# EAGLE board proto (EAGLE 6.6.0), part 1 of 3
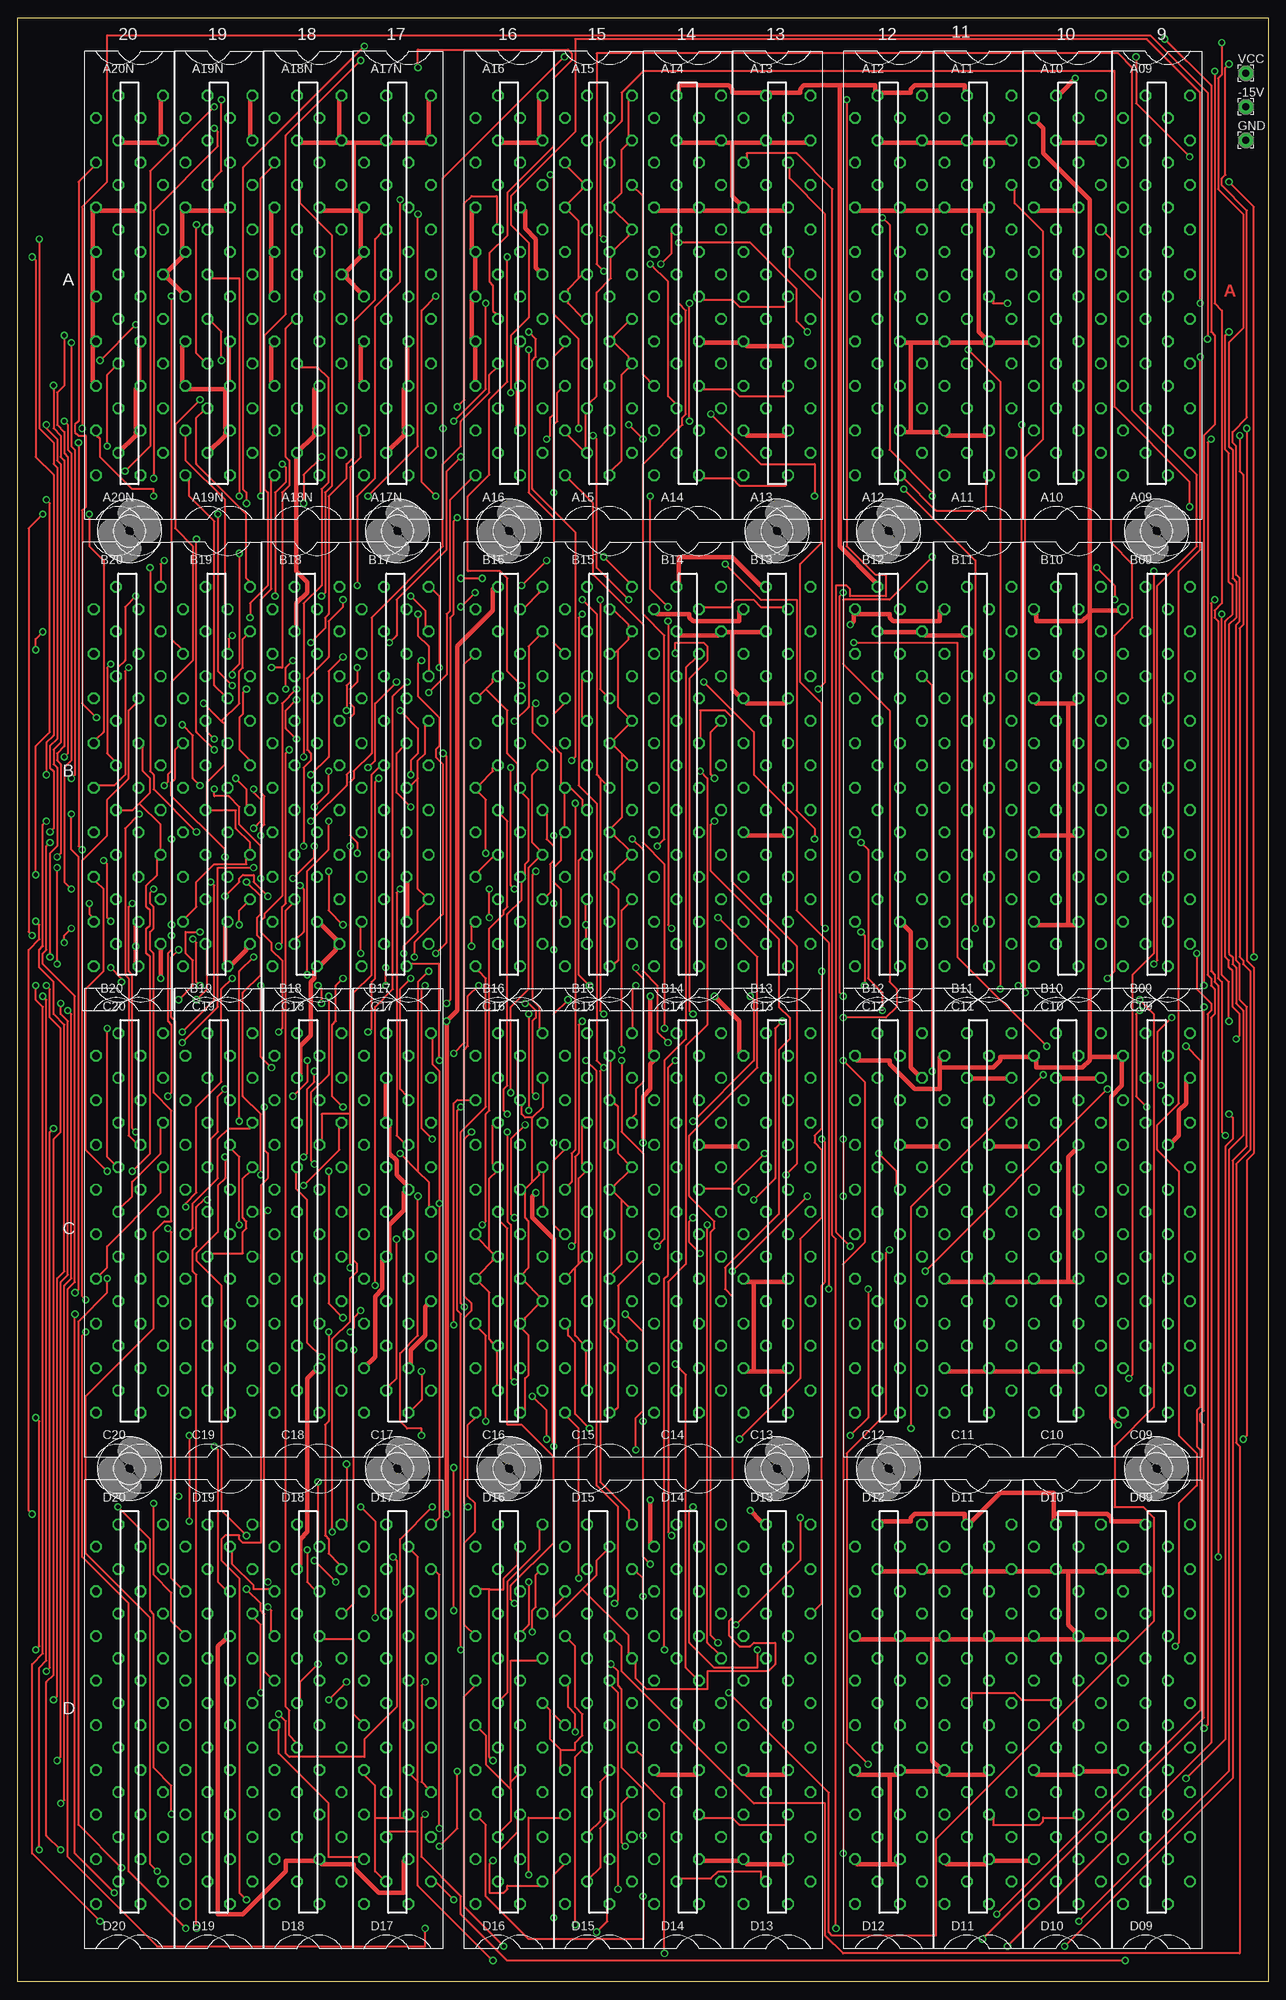
[diagram p0: board, top side]
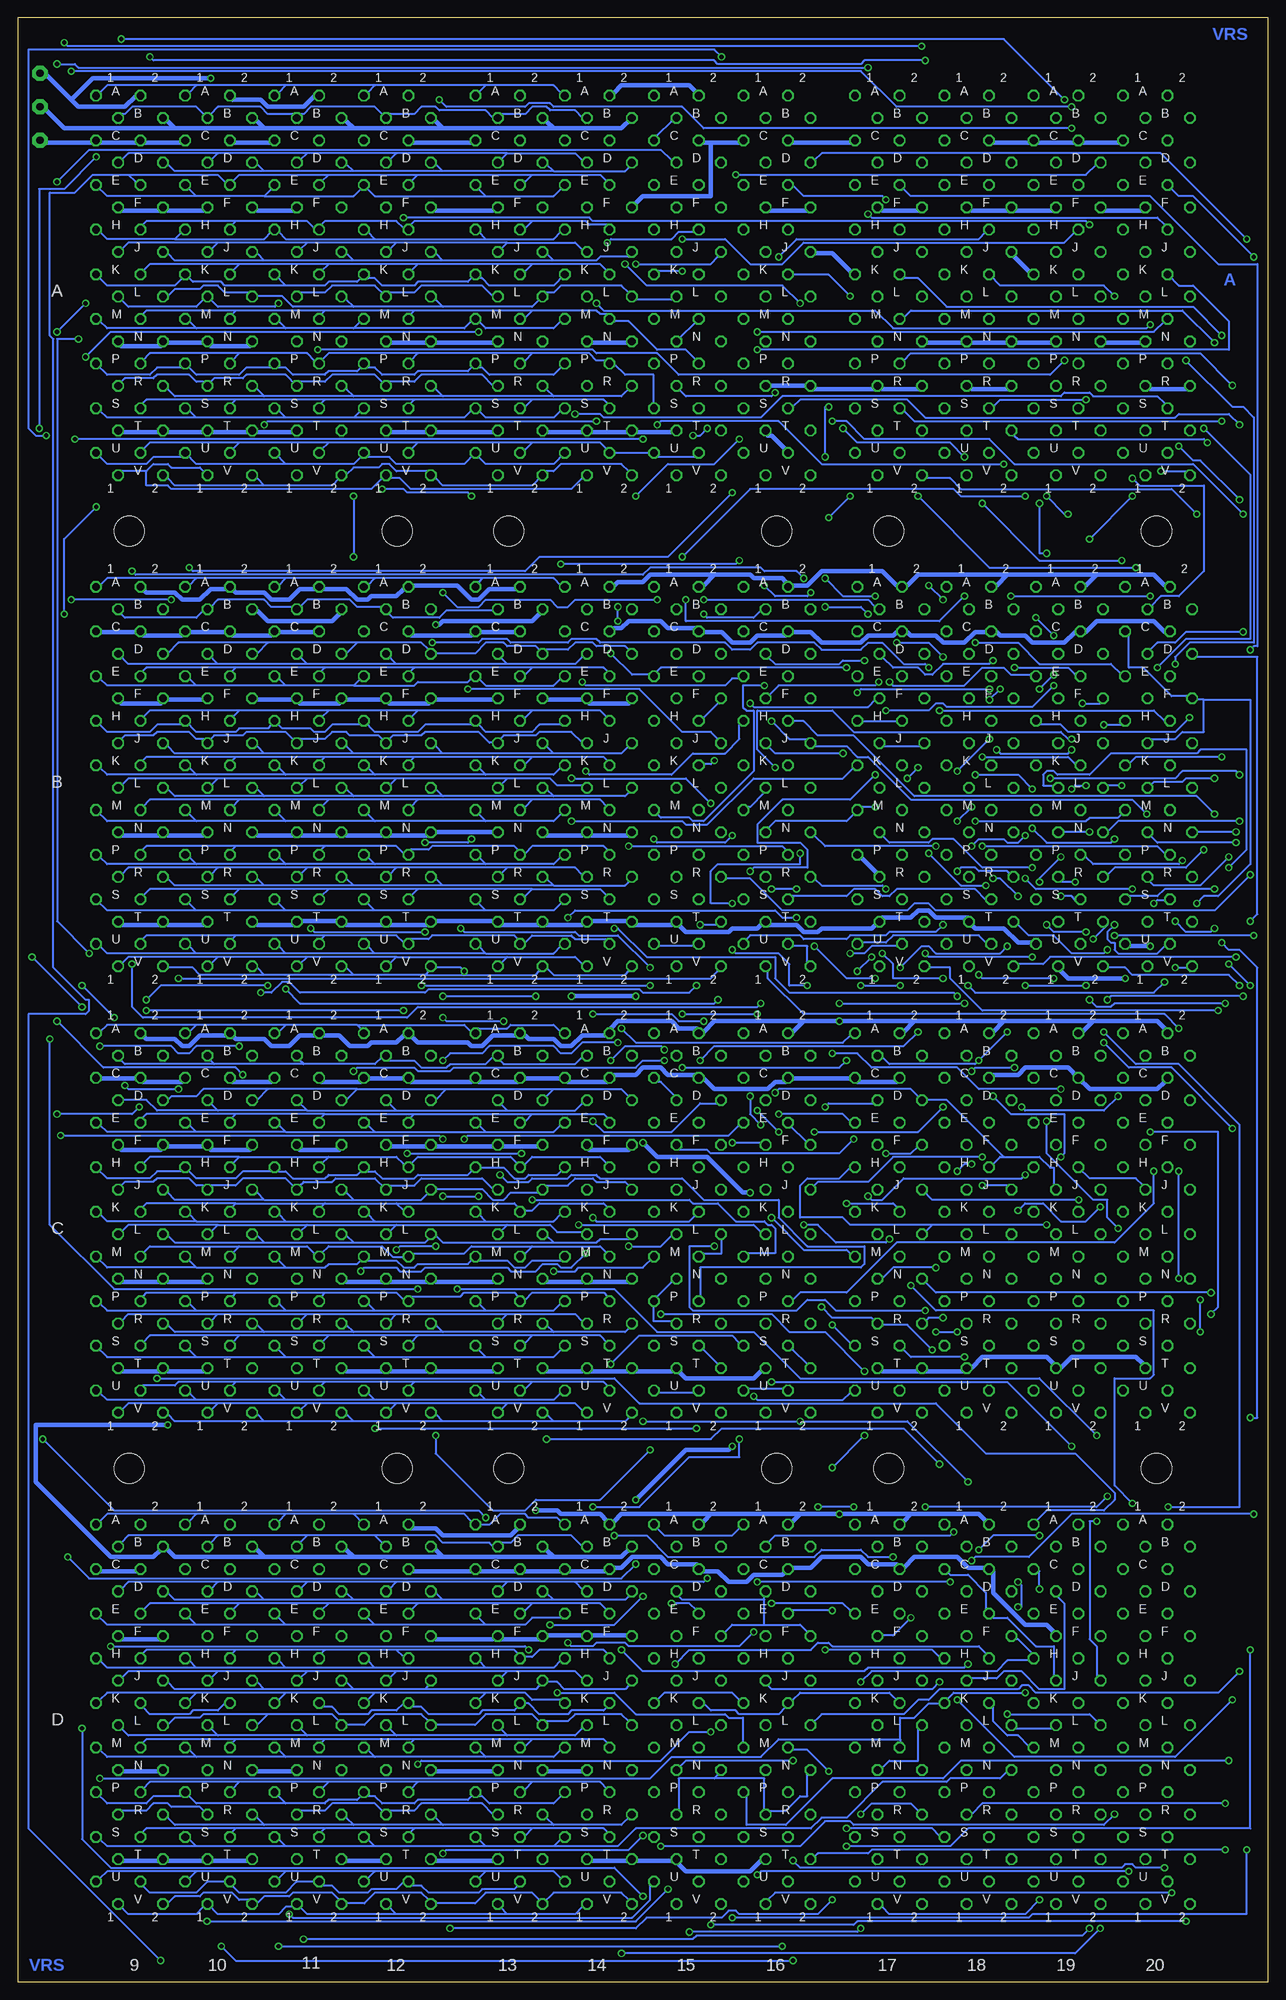
[diagram p1: board, bottom side, seen from below]

Size 177.86 x 279.39 mm. Coordinates in mm from the lower left corner, seen from the top.
Outline: 177.83,0 0,0 0.03,279.37 177.86,279.39 177.83,0
Copper layers (1*2*15*16): Top 0.035mm / dielectric 1.5mm / Route2 0.035mm / dielectric 0.15mm / Route15 0.035mm / dielectric 0.2mm / Bottom 0.035mm
Design rules "10mils": minimum track width 10mil, minimum drill 24mil, track to track 5mil, track to pad 10mil, pad to pad 10mil, via to via 5mil, smd to smd 10mil, copper to edge 40mil, drill to drill 10mil, minimum pad ring 10mil, minimum via ring 8mil, stop-mask expansion 0mil, vias tented up to drill 0mil, thermal gap 10mil
Net classes: 1 Power: width 0.635 mm

## Footprints (pad centres in the part's own frame; a part is rotated, then mirrored left to right if it is on the bottom)
2,15/1,0 = drill 1.016 pad 2.159 octagon: 1 0,0
H807 = drill 1.092 octagon: A1 4.763,28.575; A2 -1.587,28.575; B1 1.587,25.4; B2 -4.763,25.4; C1 4.763,22.225; C2 -1.587,22.225; D1 1.587,19.05; D2 -4.763,19.05; E1 4.763,15.875; E2 -1.587,15.875; F1 1.587,12.7; F2 -4.763,12.7; H1 4.763,9.525; H2 -1.587,9.525; J1 1.587,6.35; J2 -4.763,6.35; K1 4.763,3.175; K2 -1.587,3.175; L1 1.587,0; L2 -4.763,0; M1 4.763,-3.175; M2 -1.587,-3.175; N1 1.587,-6.35; N2 -4.763,-6.35; P1 4.763,-9.525; P2 -1.587,-9.525; R1 1.587,-12.7; R2 -4.763,-12.7; S1 4.763,-15.875; S2 -1.587,-15.875; T1 1.587,-19.05; T2 -4.763,-19.05; U1 4.763,-22.225; U2 -1.587,-22.225; V1 1.587,-25.4; V2 -4.763,-25.4
4,3 = hole 4.3: 0,0

## Placement (x,y rotation side)
-15V  [2,15/1,0]  174.66,266.69 0 top
A09  [H807]  161.96,239.7 0 top
A10  [H807]  149.26,239.7 0 top
A11  [H807]  136.56,239.7 0 top
A12  [H807]  123.86,239.7 0 top
A13  [H807]  107.99,239.7 0 top
A14  [H807]  95.29,239.7 0 top
A15  [H807]  82.59,239.7 0 top
A16  M903  [H807]  69.89,239.7 0 top
A17N  M903  [H807]  54.01,239.7 0 top
A18N  M903  [H807]  41.31,239.7 0 top
A19N  M903  [H807]  28.61,239.7 0 top
A20N  M903  [H807]  15.91,239.7 0 top
B09  [H807]  161.96,169.85 0 top
B10  [H807]  149.26,169.85 0 top
B11  [H807]  136.56,169.85 0 top
B12  [H807]  123.86,169.85 0 top
B13  [H807]  107.99,169.85 0 top
B14  [H807]  95.29,169.85 0 top
B15  [H807]  82.59,169.85 0 top
B16  [H807]  69.89,169.85 0 top
B17  [H807]  53.69,169.85 0 top
B18  [H807]  40.99,169.85 0 top
B19  [H807]  28.29,169.85 0 top
B20  [H807]  15.59,169.85 0 top
C09  [H807]  161.96,106.35 0 top
C10  [H807]  149.26,106.35 0 top
C11  [H807]  136.56,106.35 0 top
C12  [H807]  123.86,106.35 0 top
C13  [H807]  107.99,106.35 0 top
C14  [H807]  95.29,106.35 0 top
C15  [H807]  82.59,106.35 0 top
C16  [H807]  69.89,106.35 0 top
C17  M206X  [H807]  54.01,106.35 0 top
C18  M310  [H807]  41.31,106.35 0 top
C19  M310  [H807]  28.61,106.35 0 top
C20  M310  [H807]  15.91,106.35 0 top
D09  [H807]  161.96,36.5 0 top
D10  [H807]  149.26,36.5 0 top
D11  [H807]  136.56,36.5 0 top
D12  [H807]  123.86,36.5 0 top
D13  [H807]  107.99,36.5 0 top
D14  [H807]  95.29,36.5 0 top
D15  M206X  [H807]  82.59,36.5 0 top
D16  M206X  [H807]  69.89,36.5 0 top
D17  M206X  [H807]  54.01,36.5 0 top
D18  [H807]  41.31,36.5 0 top
D19  M921  [H807]  28.61,36.5 0 top
D20  H807  [H807]  15.91,36.5 0 top
GND  [2,15/1,0]  174.66,261.92 0 top
U$20  [4,3]  15.91,206.36 0 top
U$66  [4,3]  54.01,206.36 0 top
U$67  [4,3]  69.89,206.36 0 top
U$68  [4,3]  107.99,206.36 0 top
U$69  [4,3]  123.86,206.36 0 top
U$70  [4,3]  161.96,206.36 0 top
U$79  [4,3]  161.96,73.01 0 top
U$80  [4,3]  123.86,73.01 0 top
U$81  [4,3]  107.99,73.01 0 top
U$82  [4,3]  69.89,73.01 0 top
U$83  [4,3]  54.01,73.01 0 top
U$86  [4,3]  15.91,73.01 0 top
VCC  [2,15/1,0]  174.66,271.45 0 top

## Library data of the parts
-15V GND VCC = wirepad
A09 A10-A16 A17N A18N A19N A20N B09 B10-B20 C09 C10-C20 D09 D10-D20 = dec-m
U$20 U$66-U$70 U$79-U$83 U$86 = holes

## Nets
-15V [Power]: -15V.1 A09.B2 A10.B2 A11.B2 A12.B2 A13.B2 A14.B2 B09.B2 B10.B2 B11.B2 B12.B2 B13.B2 B14.B2 C09.B2 C10.B2 C11.B2 C12.B2 C13.B2 C14.B2 D09.B2 D10.B2 D11.B2 D12.B2 D13.B2 D14.B2
A15U1: A09.U2 A10.U2 A11.U2 A12.U2 A13.U2 A14.U2 A15.A1 A15.B1 A15.C1 A15.F1 A15.H1 A15.J1 A15.S2 A15.T2 A15.U1 A15.U2
A15V1: A15.D2 A15.E2 A15.F2 A15.K2 A15.L2 A15.M1 A15.M2 A15.N1 A15.P1 A15.V1
B17S1: B17.H1 B17.H2 B17.L1 B17.S1 D17.D1 D17.N2 D17.R1 D17.U2
B17V1: B16.A1 B16.B1 B17.V1 D15.A1 D15.K2 D16.A1 D16.K2 D17.K2
C16U1: C16.E2 C16.F2 C16.H2 C16.L2 C16.M2 C16.N2 C16.S2 C16.T2 C16.U1 C16.U2
D01BINIT: A15.R2 C16.R2 D18.B1
D01BTP2L: B16.U2 B16.V2 C17.R1 D18.E1
D01DEL1H: B16.C1 B16.J2 C20.F1
D01DEL1L: B16.D1 C17.F2 C17.K1
D01DEL2: B16.D2 C19.H2 C20.J1
D01DEL3: C17.H1 C17.L2 C19.F1
D01DEL4: B16.K1 B16.P1 C17.D2 C17.S2 C18.H2 C19.J1
D01DEL5: B16.N2 C17.N1 C18.F1
D01DONEH: D09.S1 D10.S1 D11.S1 D12.S1 D13.S1 D14.S1 D18.N2
D01DONEL: B16.S2 B18.S2 D18.M2
D01INHIBIT: A09.P2 A10.P2 A11.P2 A12.P2 A13.P2 A14.P2 A15.S1
D01INITL: A15.V2 C17.A1 C17.K2 D17.A1
D01LOADMDL: B16.N1 B17.J1 B17.J2 B17.M1
D01MEMDONEL: A16.S2 B18.V2
D01MEMSTARTL: B16.T2 C17.D1 D18.H1
D01POWEROK: B09.V2 B10.V2 B11.V2 B12.V2 B13.V2 B14.V2 D18.A1
D01READH: B16.E2 B16.F2 B16.L1 B16.M1 B16.R1 B16.S1 C17.E1
D01READL: A09.K2 A10.K2 A11.K2 A12.K2 A13.K2 A14.K2 B16.P2 B16.R2 C17.F1
D01RETURN: A09.R2 A10.R2 A11.R2 A12.R2 A13.R2 A14.R2 A15.E1
D01SELECTH: C16.K2 D17.E1
D01SELECTL: B18.T2 D17.F1
D01SELH: D17.C1 D18.S1
D01SELL: B17.V2 D18.R1
D01SOURCE: A09.L2 A10.L2 A11.L2 A12.L2 A13.L2 A14.L2 A15.L1
D01STROBE: A09.M2 A10.M2 A11.M2 A12.M2 A13.M2 A14.M2 A15.P2
D01STROBEL: A16.P2 B17.U1 B18.U2
D01WRITE: A09.S2 A10.S2 A11.S2 A12.S2 A13.S2 A14.S2 A15.J2
D01WRITEH: B16.K2 B16.L2 C16.D2 C17.S1
D02MEM0: A17N.E2 B20.D1
D02MEM1: A17N.H2 B20.E1
D02MEM2: A17N.K2 B20.K1
D02MEM3: A17N.M2 B20.L1
D02MEM4: A17N.P2 B20.R1
D02MEM5: A17N.S2 B20.S1
D02MEM6: A17N.T2 B20.H2
D02MEM7: A17N.V2 B20.J2
D02MEM8: A16.D2 B20.N2
D02MEM9: A16.E2 B20.P2
D02MEM10: A16.H2 B20.U2
D02MEM11: A16.K2 B20.V2
D03BEMA0L: A09.D2 A10.D2 A11.D2 A12.D2 A13.D2 A14.D2 D17.U1
D03BEMA1L: A09.E2 A10.E2 A11.E2 A12.E2 A13.E2 A14.E2 D17.R2
D03BEMA2L: A09.H2 A10.H2 A11.H2 A12.H2 A13.H2 A14.H2 D17.V1
D03BMA0: A20N.K2 B15.D2
D03BMA1: A20N.M2 B15.K2
D03BMA2: A20N.P2 B15.R2
D03BMA3: A20N.S2 C15.A1
D03BMA4: A20N.T2 C15.F1
D03BMA5: A20N.V2 C15.M1
D03BMA6: A19N.D2 C15.D2
D03BMA7: A19N.E2 C15.K2
D03BMA8: A19N.H2 C15.R2
D03BMA9: A19N.K2 C16.A1
D03BMA10: A19N.M2 C16.F1
D03BMA11: A19N.P2 C16.M1
D03BTP2: A16.V2 C17.B1 D18.D1
D03EA0: A18N.D2 B15.A1
D03EA1: A18N.E2 B15.F1
D03EA2: A18N.H2 B15.M1
D03EMA0H: B17.D1 D17.P1 D18.F2 D19.H1
D03EMA0L: B15.E1 B17.A1 D18.C1 D18.E2 D19.J1
D03EMA1H: B17.E1 D17.M2 D18.K1 D19.E1
D03EMA1L: B15.L1 B17.B1 D18.J1 D19.D1
D03EMA2H: D17.T2 D18.L2 D19.L1
D03EMA2L: B15.S1 D18.K2 D19.M1
D03MA0L: A09.D1 A10.D1 A11.D1 A12.D1 A13.D1 A14.D1 B15.J2
D03MA1L: A09.E1 A10.E1 A11.E1 A12.E1 A13.E1 A14.E1 B15.P2
D03MA2L: A09.H1 A10.H1 A11.H1 A12.H1 A13.H1 A14.H1 B15.V2
D03MA3L: A09.J1 A10.J1 A11.J1 A12.J1 A13.J1 A14.J1 C15.E1
D03MA4L: B09.D1 B10.D1 B11.D1 B12.D1 B13.D1 B14.D1 C15.L1
D03MA5L: B09.E1 B10.E1 B11.E1 B12.E1 B13.E1 B14.E1 C15.S1
D03MA6L: B09.H1 B10.H1 B11.H1 B12.H1 B13.H1 B14.H1 C15.J2
D03MA7L: B09.J1 B10.J1 B11.J1 B12.J1 B13.J1 B14.J1 C15.P2
D03MA8L: C15.V2 D09.D1 D10.D1 D11.D1 D12.D1 D13.D1 D14.D1
D03MA9L: C16.E1 D09.E1 D10.E1 D11.E1 D12.E1 D13.E1 D14.E1
D03MA10L: C16.L1 D09.H1 D10.H1 D11.H1 D12.H1 D13.H1 D14.H1
D03MA11L: C16.S1 D09.J1 D10.J1 D11.J1 D12.J1 D13.J1 D14.J1
D03MCBMB0L: A19N.S2 B19.A1
D03MCBMB1L: A19N.T2 B19.B1
D03MCBMB2L: A19N.V2 B19.F1
D03MCBMB3L: A20N.D2 B19.H1
D03MCBMB4L: A20N.E2 B19.M1
D03MCBMB5L: A20N.H2 B19.N1
D03MCBMB6L: A18N.K2 B19.D2
D03MCBMB7L: A18N.M2 B19.E2
D03MCBMB8L: A18N.P2 B19.K2
D03MCBMB9L: A18N.S2 B19.L2
D03MCBMB10L: A18N.T2 B19.R2
D03MCBMB11L: A18N.V2 B19.S2
D03MD4L: B09.K1 B10.K1 B11.K1 B12.K1 B13.K1 B14.K1
D03MD5L: B09.L1 B10.L1 B11.L1 B12.L1 B13.L1 B14.L1
D03MD6L: B09.M1 B10.M1 B11.M1 B12.M1 B13.M1 B14.M1
D03MD7L: B09.P1 B10.P1 B11.P1 B12.P1 B13.P1 B14.P1
D03MD8L: D09.K1 D10.K1 D11.K1 D12.K1 D13.K1 D14.K1
D03MD9L: D09.L1 D10.L1 D11.L1 D12.L1 D13.L1 D14.L1
D03MD10L: D09.M1 D10.M1 D11.M1 D12.M1 D13.M1 D14.M1
D03MD11L: D09.P1 D10.P1 D11.P1 D12.P1 D13.P1 D14.P1
D03MEMSTART: A16.M2 D17.B1 D17.L2 D17.N1 D17.S2 D18.F1
D04MD0L: A09.K1 A10.K1 A11.K1 A12.K1 A13.K1 A14.K1
D04MD1L: A09.L1 A10.L1 A11.L1 A12.L1 A13.L1 A14.L1
D04MD2L: A09.M1 A10.M1 A11.M1 A12.M1 A13.M1 A14.M1
D04MD3L: A09.P1 A10.P1 A11.P1 A12.P1 A13.P1 A14.P1
GND [Power]: A09.C1 A09.C2 A09.F1 A09.F2 A09.N1 A09.N2 A09.T1 A09.T2 A10.C1 A10.C2 A10.F1 A10.F2 A10.N1 A10.N2 A10.T1 A10.T2 A11.C1 A11.C2 A11.F1 A11.F2 A11.N1 A11.N2 A11.T1 A11.T2 A12.C1 A12.C2 A12.F1 A12.F2 A12.N1 A12.N2 A12.T1 A12.T2 A13.C1 A13.C2 A13.F1 A13.F2 A13.N1 A13.N2 A13.T1 A13.T2 A14.C1 A14.C2 A14.F1 A14.F2 A14.N1 A14.N2 A14.T1 A14.T2 A15.C2 A15.T1 A16.A1 A16.C1 A16.C2 A16.F1 A16.F2 A16.J2 A16.K1 A16.L2 A16.N1 A16.N2 A16.R1 A16.R2 A16.T1 A16.U2 A17N.A1 A17N.C1 A17N.C2 A17N.F1 A17N.F2 A17N.J2 A17N.K1 A17N.L2 A17N.N1 A17N.N2 A17N.R1 A17N.R2 A17N.T1 A17N.U2 A18N.A1 A18N.C1 A18N.C2 A18N.F1 A18N.F2 A18N.J2 A18N.K1 A18N.L2 A18N.N1 A18N.N2 A18N.R1 A18N.R2 A18N.T1 A18N.U2 A19N.A1 A19N.C1 A19N.C2 A19N.F1 A19N.F2 A19N.J2 A19N.K1 A19N.L2 A19N.N1 A19N.N2 A19N.R1 A19N.R2 A19N.T1 A19N.U2 A20N.A1 A20N.C1 A20N.C2 A20N.F1 A20N.F2 A20N.J2 A20N.K1 A20N.L2 A20N.N1 A20N.N2 A20N.R1 A20N.R2 A20N.T1 A20N.U2 B09.C1 B09.C2 B09.F1 B09.F2 B09.N1 B09.N2 B09.T1 B09.T2 B10.C1 B10.C2 B10.F1 B10.F2 B10.N1 B10.N2 B10.T1 B10.T2 B11.C1 B11.C2 B11.F1 B11.F2 B11.N1 B11.N2 B11.T1 B11.T2 B12.C1 B12.C2 B12.F1 B12.F2 B12.N1 B12.N2 B12.T1 B12.T2 B13.C1 B13.C2 B13.F1 B13.F2 B13.N1 B13.N2 B13.T1 B13.T2 B14.C1 B14.C2 B14.F1 B14.F2 B14.N1 B14.N2 B14.T1 B14.T2 B15.C2 B15.T1 B16.C2 B16.T1 B17.C2 B17.P1 B17.R1 B17.T1 B18.C2 B18.T1 B18.U1 B18.V1 B19.C2 B19.T1 B19.U1 B19.V1 B20.C2 B20.T1 B20.U1 B20.V1 C09.C1 C09.C2 C09.F1 C09.F2 C09.N1 C09.N2 C09.T1 C09.T2 C10.C1 C10.C2 C10.F1 C10.F2 C10.N1 C10.N2 C10.T1 C10.T2 C11.C1 C11.C2 C11.F1 C11.F2 C11.N1 C11.N2 C11.T1 C11.T2 C12.C1 C12.C2 C12.F1 C12.F2 C12.N1 C12.N2 C12.T1 C12.T2 C13.C1 C13.C2 C13.F1 C13.F2 C13.N1 C13.N2 C13.T1 C13.T2 C14.C1 C14.C2 C14.F1 C14.F2 C14.N1 C14.N2 C14.T1 C14.T2 C15.C2 C15.T1 C16.C2 C16.T1 C17.C1 C17.C2 C17.E2 C17.J1 C17.M2 C17.P1 C17.T1 C17.T2 C18.C2 C18.T1 C19.C2 C19.T1 C20.C2 C20.T1 D09.C1 D09.C2 D09.F1 D09.F2 D09.N1 D09.N2 D09.T1 D09.T2 D10.C1 D10.C2 D10.F1 D10.F2 D10.N1 D10.N2 D10.T1 D10.T2 D11.C1 D11.C2 D11.F1 D11.F2 D11.N1 D11.N2 D11.T1 D11.T2 D12.C1 D12.C2 D12.F1 D12.F2 D12.N1 D12.N2 D12.T1 D12.T2 D13.C1 D13.C2 D13.F1 D13.F2 D13.N1 D13.N2 D13.T1 D13.T2 D14.C1 D14.C2 D14.F1 D14.F2 D14.N1 D14.N2 D14.T1 D14.T2 D15.C2 D15.T1 D16.C2 D16.T1 D17.C2 D17.T1 D18.C2 D18.T1 D19.F1 GND.1
N$1: B15.B1 B15.C1 B15.D1 B15.H1 B15.J1 B15.K1 B15.N1 B15.P1 B15.R1 B15.V1
N$2: B15.E2 B15.F2 B15.H2 B15.L2 B15.M2 B15.N2 B15.S2 B15.T2 B15.U1 B15.U2
N$3: B19.R1 D15.P1
N$4: C15.B1 C15.C1 C15.D1 C15.H1 C15.J1 C15.K1 C15.N1 C15.P1 C15.R1 C15.V1
N$5: B19.E1 D15.E2
N$6: C15.E2 C15.F2 C15.H2 C15.L2 C15.M2 C15.N2 C15.S2 C15.T2 C15.U1 C15.U2
N$7: B19.D1 D15.C1
N$8: B17.K1 D15.B1 D15.D2 D15.H1 D15.L2
N$9: B19.L1 D15.M2
N$10: A09.A1 A10.A1 A11.A1 A12.A1 A13.A1 A14.A1
N$12: B20.H1 D15.R2
N$13: B19.K1 D15.J1
N$14: B20.A1 D15.F1
N$15: B20.B1 D15.J2
N$16: B17.K2 D15.N1 D15.S2 D16.B1 D16.D2
N$17: B20.F1 D15.M1
N$18: B19.S1 D15.T2
N$19: B19.J2 D16.E2
N$20: B19.C1 B19.F2 B19.J1 B19.M2 B19.P1 B19.T2 C16.J2
N$21: C16.V2 D15.D1 D15.F2 D15.K1 D15.N2 D15.R1 D15.U2 D16.D1 D16.F2 D16.K1 D16.N2 D16.R1 D16.U2
N$22: B20.C1 B20.F2 B20.J1 B20.M2 B20.P1 B20.T2 C16.P2
N$23: B19.H2 D16.C1
N$24: B20.N1 D15.V1
N$25: B20.E2 D16.J2
N$26: B20.D2 D16.F1
N$27: B20.M1 D15.U1
N$28: A09.B1 A10.B1 A11.B1 A12.B1 A13.B1 A14.B1
N$29: B20.S2 D16.V1
N$30: B20.R2 D16.U1
N$34: C19.H1 C19.M2
N$35: B16.V1 C20.H2
N$37: B19.V2 D16.T2
N$40: B19.U2 D16.P1
N$41: B17.N1 D16.H1 D16.L2 D16.N1 D16.S2
N$46: B16.H2 C17.N2
N$49: A09.J2 A10.J2 A11.J2 A12.J2 A13.J2 A14.J2
N$50: B19.P2 D16.M2
N$53: B19.N2 D16.J1
N$62: A09.R1 A10.R1 A11.R1 A12.R1 A13.R1 A14.R1
N$64: A09.S1 A10.S1 A11.S1 A12.S1 A13.S1 A14.S1
N$67: B20.L2 D16.R2
N$68: B20.K2 D16.M1
N$70: A09.U1 A10.U1 A11.U1 A12.U1 A13.U1 A14.U1
N$72: A09.V1 A10.V1 A11.V1 A12.V1 A13.V1 A14.V1
N$73: B17.C1 D19.A1
N$74: A09.V2 A10.V2 A11.V2 A12.V2 A13.V2 A14.V2
N$75: B09.A1 B10.A1 B11.A1 B12.A1 B13.A1 B14.A1
N$77: B09.B1 B10.B1 B11.B1 B12.B1 B13.B1 B14.B1
N$82: B09.D2 B10.D2 B11.D2 B12.D2 B13.D2 B14.D2
N$85: B09.E2 B10.E2 B11.E2 B12.E2 B13.E2 B14.E2
N$89: B09.H2 B10.H2 B11.H2 B12.H2 B13.H2 B14.H2
N$91: C20.E1 C20.K2
N$92: B16.M2 C17.U2
N$93: C20.H1 C20.N2
N$94: B16.U1 B18.R2
N$96: A15.D1 C17.J2
N$97: C19.E1 C19.L2
N$98: B09.J2 B10.J2 B11.J2 B12.J2 B13.J2 B14.J2
N$99: C18.E1 C18.J2
N$100: A15.K1 C17.M1
N$101: A15.N2 C17.R2
N$103: D18.D2 D19.B1
N$104: A15.H2 C17.U1
N$105: B09.K2 B10.K2 B11.K2 B12.K2 B13.K2 B14.K2
N$107: B09.L2 B10.L2 B11.L2 B12.L2 B13.L2 B14.L2
N$108: B17.F1 D18.H2
N$109: A15.R1 C17.V1
N$111: D18.J2 D19.C1
N$112: B17.T2 D19.D2
N$113: B16.H1 D19.L2
N$115: B09.M2 B10.M2 B11.M2 B12.M2 B13.M2 B14.M2
N$121: B09.P2 B10.P2 B11.P2 B12.P2 B13.P2 B14.P2
N$122: C16.B1 C16.C1 C16.D1 C16.H1 C16.J1 C16.K1 C16.N1 C16.P1 C16.R1 C16.V1
N$123: B09.R1 B10.R1 B11.R1 B12.R1 B13.R1 B14.R1
N$126: B09.R2 B10.R2 B11.R2 B12.R2 B13.R2 B14.R2
N$127: B09.S1 B10.S1 B11.S1 B12.S1 B13.S1 B14.S1
N$128: B16.F1 D19.F2
N$129: B16.E1 D19.J2
N$130: B09.S2 B10.S2 B11.S2 B12.S2 B13.S2 B14.S2
N$132: B16.J1 B17.U2
N$134: B09.U1 B10.U1 B11.U1 B12.U1 B13.U1 B14.U1
N$135: B09.U2 B10.U2 B11.U2 B12.U2 B13.U2 B14.U2
N$136: B09.V1 B10.V1 B11.V1 B12.V1 B13.V1 B14.V1
N$141: C09.A1 C10.A1 C11.A1 C12.A1 C13.A1 C14.A1
N$144: C09.B1 C10.B1 C11.B1 C12.B1 C13.B1 C14.B1
N$154: C09.D1 C10.D1 C11.D1 C12.D1 C13.D1 C14.D1
N$156: C09.D2 C10.D2 C11.D2 C12.D2 C13.D2 C14.D2
N$157: C09.E1 C10.E1 C11.E1 C12.E1 C13.E1 C14.E1
N$158: C09.E2 C10.E2 C11.E2 C12.E2 C13.E2 C14.E2
N$163: C09.H1 C10.H1 C11.H1 C12.H1 C13.H1 C14.H1
N$164: C09.H2 C10.H2 C11.H2 C12.H2 C13.H2 C14.H2
N$165: C09.J1 C10.J1 C11.J1 C12.J1 C13.J1 C14.J1
N$166: C09.J2 C10.J2 C11.J2 C12.J2 C13.J2 C14.J2
N$167: C09.K1 C10.K1 C11.K1 C12.K1 C13.K1 C14.K1
N$168: C09.K2 C10.K2 C11.K2 C12.K2 C13.K2 C14.K2
N$169: C09.L1 C10.L1 C11.L1 C12.L1 C13.L1 C14.L1
N$170: C09.L2 C10.L2 C11.L2 C12.L2 C13.L2 C14.L2
N$171: C09.M1 C10.M1 C11.M1 C12.M1 C13.M1 C14.M1
N$172: C09.M2 C10.M2 C11.M2 C12.M2 C13.M2 C14.M2
N$175: C09.P1 C10.P1 C11.P1 C12.P1 C13.P1 C14.P1
N$176: C09.P2 C10.P2 C11.P2 C12.P2 C13.P2 C14.P2
N$177: C09.R1 C10.R1 C11.R1 C12.R1 C13.R1 C14.R1
N$178: C09.R2 C10.R2 C11.R2 C12.R2 C13.R2 C14.R2
N$179: C09.S1 C10.S1 C11.S1 C12.S1 C13.S1 C14.S1
N$180: C09.S2 C10.S2 C11.S2 C12.S2 C13.S2 C14.S2
N$183: C09.U1 C10.U1 C11.U1 C12.U1 C13.U1 C14.U1
N$184: C09.U2 C10.U2 C11.U2 C12.U2 C13.U2 C14.U2
N$186: C09.V1 C10.V1 C11.V1 C12.V1 C13.V1 C14.V1
N$187: C09.V2 C10.V2 C11.V2 C12.V2 C13.V2 C14.V2
N$188: D09.A1 D10.A1 D11.A1 D12.A1 D13.A1 D14.A1
N$190: D09.B1 D10.B1 D11.B1 D12.B1 D13.B1 D14.B1
N$196: D09.D2 D10.D2 D11.D2 D12.D2 D13.D2 D14.D2
N$198: D09.E2 D10.E2 D11.E2 D12.E2 D13.E2 D14.E2
N$202: D09.H2 D10.H2 D11.H2 D12.H2 D13.H2 D14.H2
N$204: D09.J2 D10.J2 D11.J2 D12.J2 D13.J2 D14.J2
N$206: D09.K2 D10.K2 D11.K2 D12.K2 D13.K2 D14.K2
N$208: D09.L2 D10.L2 D11.L2 D12.L2 D13.L2 D14.L2
N$210: D09.M2 D10.M2 D11.M2 D12.M2 D13.M2 D14.M2
N$214: D09.P2 D10.P2 D11.P2 D12.P2 D13.P2 D14.P2
N$215: D09.R1 D10.R1 D11.R1 D12.R1 D13.R1 D14.R1
N$216: D09.R2 D10.R2 D11.R2 D12.R2 D13.R2 D14.R2
N$218: D09.S2 D10.S2 D11.S2 D12.S2 D13.S2 D14.S2
N$221: D09.U1 D10.U1 D11.U1 D12.U1 D13.U1 D14.U1
N$222: D09.U2 D10.U2 D11.U2 D12.U2 D13.U2 D14.U2
N$223: D09.V1 D10.V1 D11.V1 D12.V1 D13.V1 D14.V1
N$224: D09.V2 D10.V2 D11.V2 D12.V2 D13.V2 D14.V2
VCC [Power]: A09.A2 A10.A2 A11.A2 A12.A2 A13.A2 A14.A2 A15.A2 B09.A2 B10.A2 B11.A2 B12.A2 B13.A2 B14.A2 B15.A2 B16.A2 B17.A2 B18.A2 B19.A2 B20.A2 C09.A2 C10.A2 C11.A2 C12.A2 C13.A2 C14.A2 C15.A2 C16.A2 C17.A2 C18.A2 C19.A2 C20.A2 D09.A2 D10.A2 D11.A2 D12.A2 D13.A2 D14.A2 D15.A2 D16.A2 D17.A2 D18.A2 VCC.1

## Tracks (layer width: path | path; a pad name or v marks a point on that pad's centre or on a via)
-15V  (via drill 0.61)
  Top 0.635: v89.95,140.2 89.95,132.07 C14.B2 90.46,131.05 89.95,130.54 89.95,126.99 88.94,125.97 v88.94,119.37 | v99.1,140.2 102.65,136.64 102.65,132.07 C13.B2 | v73.7,112.26 73.19,111.75 73.19,108.7 76.24,105.65 v76.24,76.19 | v89.95,68.57 89.95,62.47 D14.B2 | 131.1,130.04 131.1,131.56 C11.B2 | 131.1,130.04 131.1,126.99 127.54,126.99 123.99,130.54 123.99,131.05 119.42,131.05 C12.B2 | 131.1,130.04 138.72,130.04 139.74,131.05 139.74,131.56 143.8,131.56 C10.B2 144.82,131.05 144.82,130.04 151.42,130.04 152.44,131.05 152.44,131.56 | 152.44,131.56 156.5,131.56 C09.B2 157.01,131.05 157.01,127.5 155.48,125.97 155.48,80.25 v156.5,79.24 | B14.B2 90.97,194.55 95.54,194.55 95.54,194.04 96.05,193.54 102.65,193.54 102.65,195.06 B13.B2 | B11.B2 131.1,195.06 131.1,193.54 124.5,193.54 123.99,194.04 123.99,194.55 119.42,194.55 B12.B2 118.91,194.55 118.91,193.54 v118.4,193.03 | 152.44,195.06 156.5,195.06 B09.B2 | 152.44,194.55 152.44,195.06 | 152.44,194.55 151.42,193.54 144.82,193.54 144.82,194.55 B10.B2 | 152.44,131.56 152.44,194.55 | 152.44,195.06 152.44,253.48 145.83,260.08 145.83,263.64 144.82,264.66 A10.B2
  Bottom 0.635: v89.95,140.2 v99.1,140.2 | 101.64,60.44 91.98,60.44 D14.B2 | 101.64,60.44 102.65,61.46 D13.B2 | 117.38,60.44 118.4,61.46 D12.B2 | 117.38,60.44 101.64,60.44 | 130.08,60.44 131.1,61.46 D11.B2 | 130.08,60.44 117.38,60.44 | 142.78,60.44 143.8,61.46 D10.B2 | 142.78,60.44 130.08,60.44 | 142.78,60.44 155.48,60.44 156.5,61.46 D09.B2 157.52,61.46 158.53,60.44 164.63,60.44 175.3,71.11 175.3,79.24 v156.5,79.24 | v88.94,119.37 86.9,117.34 79.79,117.34 74.71,112.26 v73.7,112.26 | v76.24,76.19 76.74,75.68 82.84,75.68 v89.95,68.57 | 101.64,263.64 91.98,263.64 A14.B2 | 101.64,263.64 102.65,264.66 A13.B2 | 117.38,263.64 118.4,264.66 A12.B2 | 117.38,263.64 101.64,263.64 | 130.08,263.64 131.1,264.66 A11.B2 | 130.08,263.64 117.38,263.64 | 142.78,263.64 143.8,264.66 A10.B2 | 142.78,263.64 130.08,263.64 | 155.48,263.64 156.5,264.66 A09.B2 | 142.78,263.64 155.48,263.64 | 155.48,263.64 171.23,263.64 173.77,266.18 -15V.1 | B10.B2 143.8,195.06 142.28,193.54 133.13,193.54 132.12,194.55 B11.B2 | v118.4,193.03 117.89,193.03 117.38,193.54 104.68,193.54 103.67,194.55 B13.B2
A15U1
  Top 0.254: A15.A1 86.9,267.7 86.9,262.62 A15.C1 86.9,261.61 85.89,260.59 85.89,254.5 84.36,252.97 A15.F1 84.87,251.96 86.9,249.92 A15.H1 86.9,248.91 86.9,248.4 84.87,246.37 A15.J1 84.36,245.35 84.36,242.3 82.33,240.27 82.33,225.54 81.32,224.52 A15.S2 80.81,223.51 80.81,217.92 A15.U2 80.3,217.92 78.27,219.95 A15.T2
  Bottom 0.254: A15.B1 84.87,264.66 86.9,262.62 A15.C1 | 104.68,218.94 105.7,217.92 A13.U2 | 104.68,218.94 95.03,218.94 94.02,217.92 A14.U2 93,217.41 87.92,217.41 A15.U1 86.9,216.9 81.32,216.9 A15.U2 | 120.94,218.94 121.96,217.92 A12.U2 | 104.68,218.94 120.94,218.94 | 133.64,218.94 134.66,217.92 A11.U2 | 120.94,218.94 133.64,218.94 | 146.34,218.94 147.36,217.92 A10.U2 | 133.64,218.94 146.34,218.94 | 146.34,218.94 159.04,218.94 160.06,217.92 A09.U2
A15V1
  Top 0.254: A15.D2 78.27,258.05 80.3,256.02 A15.E2 80.3,255.51 80.3,255 78.27,252.97 A15.F2 79.79,250.43 79.79,242.3 | A15.M2 80.3,236.72 78.27,238.75 78.27,239.26 A15.L2 78.27,240.27 78.27,240.78 79.79,242.3 | 79.79,242.3 80.3,242.81 A15.K2 | A15.V1 84.36,214.87 85.89,216.4 85.89,228.59 86.9,229.6 A15.P1 86.9,230.62 86.9,231.13 84.87,233.16 A15.N1 84.87,233.67 84.87,234.18 86.9,236.21 A15.M1
  Bottom 0.254: A15.N1 A15.M2
B17S1  (via drill 0.61)
  Top 0.254: 56.93,171.18 55.92,170.17 B17.L1 | 56.93,171.18 56.93,173.72 57.95,174.74 57.95,178.8 B17.H1 | 56.93,171.18 56.93,155.44 57.95,154.42 B17.S1 57.95,153.4 56.93,152.39 56.93,149.34 54.9,147.31 v54.9,146.29 | 50.84,23.36 50.84,27.93 49.31,29.45 D17.N2 | 50.84,23.36 50.84,15.74 51.85,14.72 D17.U2 | 50.84,23.36 54.39,23.36 | 54.39,23.36 54.9,23.36 D17.R1 | 54.39,53.84 55.41,54.85 D17.D1 | 54.39,23.36 54.39,53.84 | v46.26,142.74 45.25,141.72 45.25,136.64 44.74,136.13 44.74,125.97 v46.26,124.45 | v64.55,120.89 63.54,119.88 63.54,97.52 64.55,96.51 64.55,95.49 63.54,94.48 63.54,68.06 v64.04,67.55 | v58.96,67.55 54.39,62.98 54.39,53.84
  Bottom 0.254: B17.H2 52.87,179.31 57.95,179.31 B17.H1 | v54.9,146.29 53.38,144.77 53.38,142.74 v46.26,142.74 | v46.26,124.45 49.82,120.89 v64.55,120.89 | v58.96,67.55 v64.04,67.55
B17V1  (via drill 0.61)
  Top 0.254: B16.B1 72.17,195.57 74.2,197.6 74.2,198.11 B16.A1 | v59.98,131.05 59.98,144.77 55.92,144.77 B17.V1 | D15.A1 86.9,65.52 86.9,67.04 82.84,71.11 82.84,129.53 v83.35,130.04 82.33,131.05 82.33,167.63 79.79,170.17 79.79,194.04 v80.3,194.55 | D16.K2 68.62,40.12 69.63,41.14 69.63,56.88 74.2,61.46 74.2,64.5 D16.A1
  Bottom 0.254: D17.K2 53.88,41.14 66.58,41.14 67.6,40.12 D16.K2 68.62,39.1 69.63,38.09 75.22,38.09 75.73,38.6 79.28,38.6 80.3,39.61 D15.K2 | v59.98,131.05 61,130.04 v83.35,130.04 | D16.A1 76.24,63.49 85.89,63.49 86.9,64.5 D15.A1 | v80.3,194.55 79.79,194.04 73.19,194.04 72.17,195.06 B16.B1
C16U1
  Top 0.254: C16.E2 67.6,121.91 67.6,116.32 C16.H2 68.11,115.3 67.09,114.29 67.09,104.13 | 67.09,104.13 67.6,103.62 C16.M2 67.6,103.11 67.6,102.6 65.57,100.57 C16.N2 67.09,98.03 67.09,91.43 67.6,90.92 C16.S2 68.11,89.9 68.11,84.82 C16.U2 | 67.09,104.13 65.57,105.65 C16.L2
  Bottom 0.254: C16.F2 65.57,119.37 68.11,121.91 C16.E2 | C16.T2 65.57,87.87 67.6,89.9 68.11,89.9 C16.S2 | C16.U1 74.2,84.32 68.62,84.32 C16.U2
D01BINIT  (via drill 0.61)
  Top 0.254: v42.71,71.11 42.71,62.47 D18.B1 | v66.58,79.74 66.58,91.94 65.57,92.95 C16.R2 | v76.24,211.82 76.24,221.48 76.74,221.98 76.74,226.05 77.25,226.56 A15.R2 | v153.45,201.16 155.99,198.62 v155.99,196.58 | v170.22,196.58 169.71,196.08 169.71,143.75 170.22,143.24 170.22,142.23 170.72,141.72 v170.72,60.44 | v89.95,59.42 88.94,60.44 v88.94,79.74
  Bottom 0.254: v42.71,71.11 51.34,79.74 v66.58,79.74 v88.94,79.74 | v76.24,211.82 85.38,202.68 103.67,202.68 105.7,200.65 152.94,200.65 v153.45,201.16 | v155.99,196.58 v170.22,196.58 | v170.72,60.44 167.68,57.39 91.98,57.39 v89.95,59.42
D01BTP2L  (via drill 0.61)
  Top 0.254: v47.79,89.9 47.79,53.84 46.77,52.82 D18.E1 | v63.54,96 63.03,96.51 63.03,120.89 66.58,124.45 66.58,142.74 65.57,143.75 B16.V2
  Bottom 0.254: B16.V2 65.57,144.77 65.57,147.31 67.6,147.31 B16.U2 | v47.79,89.9 51.34,93.46 54.9,93.46 C17.R1 56.42,94.48 62.01,94.48 v63.54,96
D01DEL1H  (via drill 0.61)
  Top 0.254: v17.31,166.1 15.28,164.07 15.28,143.24 15.78,142.74 15.78,120.38 16.8,119.37 C20.F1 | v70.65,179.31 72.68,181.34 72.68,189.98 74.2,191.5 B16.C1
  Bottom 0.254: v17.31,166.1 19.34,168.14 50.84,168.14 56.93,174.23 58.46,174.23 59.98,175.76 64.55,175.76 B16.J2 65.57,176.77 68.11,176.77 v70.65,179.31
D01DEL1L  (via drill 0.61)
  Top 0.254: 56.93,115.3 58.46,113.78 58.46,110.22 C17.K1 | 56.93,115.3 v54.39,117.84 | v57.44,187.95 56.93,187.44 56.93,182.87 59.98,179.82 59.98,175.76 59.47,175.25 59.47,174.23 60.49,173.22 60.49,151.88 56.42,147.82 v56.42,145.78 | v58.46,143.75 56.93,142.23 56.93,115.3
  Bottom 0.254: v54.39,117.84 50.84,117.84 49.82,118.86 C17.F2 | v57.44,187.95 60.49,187.95 61,187.44 70.14,187.44 71.16,188.46 B16.D1 | v56.42,145.78 v58.46,143.75
D01DEL2  (via drill 0.61)
  Top 0.254: v62.01,132.07 63.54,133.59 63.54,187.44 64.55,188.46 B16.D2 | v29.5,126.99 28.48,125.97 28.48,120.89 27.47,119.88 27.47,116.32 C19.H2
  Bottom 0.254: C20.J1 17.82,113.27 18.83,114.29 25.44,114.29 C19.H2 | v62.01,132.07 58.46,132.07 56.42,130.04 44.23,130.04 41.18,126.99 v29.5,126.99
D01DEL3  (via drill 0.61)
  Top 0.254: v31.53,107.68 31.53,117.34 30.52,118.35 C19.F1
  Bottom 0.254: v31.53,107.68 47.79,107.68 | 47.79,107.68 48.8,106.67 C17.L2 | 47.79,107.68 59.47,107.68 60.49,108.7 66.58,108.7 66.58,113.27 65.57,114.29 61,114.29 59.47,115.81 C17.H1
D01DEL4  (via drill 0.61)
  Top 0.254: B16.K1 74.2,172.71 73.19,171.69 73.19,162.04 74.2,161.02 B16.P1 74.2,160.01 72.68,158.48 72.68,141.21 70.14,138.67 v70.14,126.48 | v43.22,88.89 41.18,90.92 41.18,111.24 39.66,112.76 39.66,115.3 C18.H2
  Bottom 0.254: 37.63,117.34 38.14,117.34 39.15,116.32 C18.H2 | 37.63,117.34 32.55,117.34 31.02,115.81 30.52,115.81 30.52,113.27 C19.J1 | v43.22,88.89 50.84,88.89 C17.S2 | 37.63,117.34 45.76,125.46 48.8,125.46 C17.D2 50.84,126.99 69.63,126.99 v70.14,126.48
D01DEL5  (via drill 0.61)
  Top 0.254: v47.28,101.59 47.28,123.43 | 47.28,123.43 43.22,123.43 43.22,119.37 C18.F1 | 47.28,123.43 v47.28,161.53
  Bottom 0.254: v47.28,101.59 53.38,101.59 54.9,100.06 C17.N1 | v47.28,161.53 63.03,161.53 64.55,163.06 B16.N2
D01DONEH
  Bottom 0.254: 101.64,19.29 100.62,20.31 D14.S1 | 101.64,19.29 111.29,19.29 | 111.29,19.29 112.3,20.31 D13.S1 | 101.64,19.29 92.49,19.29 89.95,21.83 65.06,21.83 63.54,23.36 59.98,23.36 54.9,28.44 45.76,28.44 45.25,28.94 38.14,28.94 37.12,29.96 D18.N2 | 127.04,19.29 128.05,20.31 D12.S1 | 111.29,19.29 127.04,19.29 | 139.74,19.29 140.75,20.31 D11.S1 | 127.04,19.29 139.74,19.29 | 152.44,19.29 153.45,20.31 D10.S1 | 139.74,19.29 152.44,19.29 | 152.44,19.29 165.14,19.29 166.15,20.31 D09.S1
D01DONEL
  Top 0.254: D18.M2 39.66,34.02 38.64,35.04 38.64,38.6 38.14,39.1 38.14,152.39 39.15,153.4 B18.S2
  Bottom 0.254: B16.S2 67.6,154.42 59.98,154.42 58.96,155.44 55.92,155.44 54.9,154.42 53.88,154.42 52.87,155.44 41.69,155.44 40.17,153.91 B18.S2
D01INHIBIT
  Bottom 0.254: A15.S1 87.41,224.52 87.41,228.59 91.48,228.59 93,230.11 A14.P2 94.02,230.62 95.54,230.62 96.56,231.64 104.68,231.64 | 104.68,231.64 105.7,230.62 A13.P2 | 120.94,231.64 121.96,230.62 A12.P2 | 104.68,231.64 120.94,231.64 | 120.94,231.64 133.64,231.64 134.66,230.62 A11.P2 135.67,230.62 136.69,231.64 146.34,231.64 | 146.34,231.64 147.36,230.62 A10.P2 | 146.34,231.64 159.04,231.64 160.06,230.62 A09.P2
D01INITL  (via drill 0.61)
  Top 0.254: C17.A1 58.96,134.61 58.96,130.54 59.98,129.53 v59.98,110.73 59.98,66.03 59.47,65.52 D17.A1 | v91.98,135.62 91.98,158.99 88.94,162.04 88.94,193.03 81.82,200.14 81.82,210.3 A15.V2
  Bottom 0.254: v59.98,110.73 53.38,110.73 52.87,110.22 C17.K2 | v91.98,135.62 89.95,133.59 60.49,133.59 59.47,134.61 C17.A1
D01LOADMDL  (via drill 0.61)
  Top 0.254: v55.92,167.12 53.88,169.15 53.88,174.74 54.9,175.76 B17.J1
  Bottom 0.254: B17.J2 49.31,175.76 54.9,175.76 B17.J1 | B16.N1 71.16,164.07 70.14,165.09 59.98,165.09 58.96,166.1 B17.M1 57.95,167.12 v55.92,167.12
D01MEMDONEL  (via drill 0.61)
  Top 0.254: v4.61,145.78 4.61,160.52 5.62,161.53 5.62,172.71 5.12,173.22 5.12,175.25 6.13,176.26 6.13,215.89 5.62,216.4 5.62,219.44 4.1,220.97 v4.1,221.48
  Bottom 0.254: v4.61,145.78 31.02,145.78 32.04,144.77 35.6,144.77 B18.V2 | v4.1,221.48 5.62,223 12.74,223 13.24,222.49 48.8,222.49 51.34,225.03 66.58,225.03 67.6,224.02 A16.S2
D01MEMSTARTL  (via drill 0.61)
  Top 0.254: v63.03,47.23 63.03,94.98 62.52,95.49 62.52,123.94 v63.03,124.45 | v64.55,147.31 64.55,150.36 B16.T2 | v55.92,142.74 54.39,141.21 54.39,126.99 55.41,125.97 C17.D1
  Bottom 0.254: v63.03,47.23 47.79,47.23 46.77,46.22 D18.H1 | v63.03,124.45 62.52,124.96 55.92,124.96 C17.D1 | v64.55,147.31 59.98,142.74 v55.92,142.74
D01POWEROK  (via drill 0.61)
  Top 0.254: v46.77,73.65 46.77,65.52 D18.A1 | v102.65,77.2 111.29,85.84 111.29,105.65 114.34,108.7 114.34,118.35 113.32,119.37 113.32,120.38 114.34,121.4 v114.34,143.75
  Bottom 0.254: B14.V2 90.97,143.75 91.48,143.24 101.64,143.24 102.65,144.26 B13.V2 103.67,143.75 104.18,143.24 119.92,143.24 | v46.77,73.65 51.85,78.73 77.76,78.73 79.28,77.2 v102.65,77.2 | v114.34,143.75 114.84,144.26 118.4,144.26 B12.V2 119.42,143.75 119.92,143.24 | 130.08,143.24 131.1,144.26 B11.V2 | 119.92,143.24 130.08,143.24 | 142.78,143.24 143.8,144.26 B10.V2 | 130.08,143.24 142.78,143.24 | 142.78,143.24 151.93,143.24 152.94,144.26 156.5,144.26 B09.V2
D01READH  (via drill 0.61)
  Top 0.254: 66.58,183.88 67.6,184.9 67.6,185.41 B16.E2 | 66.58,183.88 65.57,182.87 B16.F2 | B16.S1 75.22,154.42 75.73,154.93 75.73,158.99 76.24,159.5 76.24,161.53 75.22,162.55 75.22,166.1 B16.M1 | 66.58,183.88 69.63,180.84 69.63,174.74 71.16,173.22 71.16,170.17 B16.L1 71.66,169.15 72.68,168.14 72.68,159.5 72.17,158.99 72.17,157.47 B16.R1 71.66,156.45 71.66,153.91 69.63,151.88 69.63,127.5 69.12,126.99 69.12,123.94 v69.63,123.43
  Bottom 0.254: B16.L1 71.66,169.15 73.7,167.12 74.2,167.12 B16.M1 | v69.63,123.43 60.49,123.43 59.47,122.42 C17.E1
D01READL  (via drill 0.61)
  Top 0.254: v54.39,155.44 53.88,154.93 53.88,120.38 54.9,119.37 C17.F1 | B16.P2 67.6,160.01 65.57,157.98 65.57,157.47 B16.R2 | v90.97,161.53 91.98,162.55 91.98,191.5 88.94,194.55 88.94,215.89 94.52,221.48 94.52,222.49 95.03,223 95.03,237.73 94.02,238.75 94.02,242.3 A14.K2
  Bottom 0.254: v54.39,155.44 54.9,155.94 63.54,155.94 64.55,156.96 B16.R2 | 104.68,244.34 95.03,244.34 94.02,243.32 A14.K2 | 104.68,244.34 105.7,243.32 A13.K2 | 120.94,244.34 121.96,243.32 A12.K2 | 104.68,244.34 120.94,244.34 | 133.64,244.34 134.66,243.32 A11.K2 | 120.94,244.34 133.64,244.34 | 146.34,244.34 147.36,243.32 A10.K2 | 133.64,244.34 146.34,244.34 | 146.34,244.34 159.04,244.34 160.06,243.32 A09.K2 | v90.97,161.53 69.12,161.53 68.62,161.02 B16.P2
D01RETURN
  Top 0.254: A15.E1 88.94,253.99 88.94,228.59 A14.R2
  Bottom 0.254: 101.64,225.54 91.98,225.54 A14.R2 | 101.64,225.54 102.65,226.56 A13.R2 | 117.38,225.54 118.4,226.56 A12.R2 | 101.64,225.54 117.38,225.54 | 130.08,225.54 131.1,226.56 A11.R2 | 117.38,225.54 130.08,225.54 | 142.78,225.54 143.8,226.56 A10.R2 | 130.08,225.54 142.78,225.54 | 142.78,225.54 155.48,225.54 156.5,226.56 A09.R2
D01SELECTH  (via drill 0.61)
  Top 0.254: v70.65,53.84 70.14,54.34 70.14,56.38 76.24,62.47 76.24,74.66 71.66,79.24 69.63,79.24 69.63,107.18 68.62,108.19 68.62,109.21 C16.K2
  Bottom 0.254: v70.65,53.84 60.49,53.84 59.47,52.82 D17.E1
D01SELECTL  (via drill 0.61)
  Top 0.254: v22.9,146.8 21.88,145.78 21.88,137.15 22.39,136.64 22.39,69.58 v22.9,69.08 | v48.8,67.55 50.84,65.52 v50.84,51.8
  Bottom 0.254: v22.9,146.8 23.4,146.29 27.98,146.29 30.52,148.83 34.07,148.83 35.6,150.36 B18.T2 | v22.9,69.08 24.42,67.55 v48.8,67.55 | v50.84,51.8 53.38,49.26 54.9,49.26 D17.F1
D01SELH  (via drill 0.61)
  Top 0.254: v59.98,21.83 59.98,57.9 59.47,58.41 D17.C1
  Bottom 0.254: v59.98,21.83 47.79,21.83 46.77,20.82 D18.S1
D01SELL  (via drill 0.61)
  Top 0.254: v6.13,25.39 6.64,25.9 6.64,99.05 7.66,100.06 7.66,137.66 v7.15,138.16
  Bottom 0.254: v6.13,25.39 40.68,25.39 42.2,23.86 D18.R1 | v7.15,138.16 40.68,138.16 45.25,142.74 45.25,144.26 48.3,144.26 B17.V2
D01SOURCE
  Bottom 0.254: A15.L1 84.87,239.26 89.95,239.26 A14.L2 90.97,240.27 91.98,241.29 100.62,241.29 101.64,240.27 102.65,240.27 A13.L2 104.68,238.24 117.38,238.24 | 117.38,238.24 118.4,239.26 A12.L2 | 130.08,238.24 131.1,239.26 A11.L2 | 117.38,238.24 130.08,238.24 | 130.08,238.24 138.72,238.24 140.24,239.76 143.8,239.76 A10.L2 144.82,240.27 148.37,240.27 149.39,241.29 151.42,241.29 151.93,240.78 155.48,240.78 156.5,239.76 A09.L2
D01STROBE
  Bottom 0.254: A15.P2 81.32,230.62 82.84,232.14 86.9,232.14 90.97,236.21 93,236.21 A14.M2 94.02,237.22 95.03,237.22 95.54,237.73 104.68,237.73 | 104.68,237.73 105.7,236.72 A13.M2 | 121.45,237.73 121.96,237.22 A12.M2 | 104.68,237.73 121.45,237.73 | 134.15,237.73 134.66,237.22 A11.M2 | 121.45,237.73 134.15,237.73 | 146.85,237.73 147.36,237.22 A10.M2 | 134.15,237.73 146.85,237.73 | 146.85,237.73 159.55,237.73 160.06,237.22 A09.M2
D01STROBEL  (via drill 0.61)
  Top 0.254: v48.3,160.52 48.3,162.04 47.28,163.06 47.28,170.68 47.79,171.18 47.79,172.2 50.33,174.74 50.33,194.04 60.49,204.2 60.49,215.89 63.03,218.43 63.03,221.98 67.09,226.05 67.09,228.59 68.11,229.6 A16.P2 | v40.17,155.94 40.68,155.44 40.68,149.34 39.66,148.32 B18.U2
  Bottom 0.254: B18.U2 40.17,147.82 41.18,148.83 53.38,148.83 54.39,147.82 57.95,147.82 B17.U1 | v48.3,160.52 43.72,155.94 v40.17,155.94
D01WRITE  (via drill 0.61)
  Top 0.254: v89.95,244.34 92.49,241.8 92.49,225.54 93.51,224.52 A14.S2
  Bottom 0.254: 104.68,225.03 94.52,225.03 94.02,224.52 A14.S2 | 104.68,225.03 105.7,224.02 A13.S2 | v89.95,244.34 79.28,244.34 78.27,245.35 A15.J2 | 121.45,225.03 121.96,224.52 A12.S2 | 104.68,225.03 121.45,225.03 | 134.15,225.03 134.66,224.52 A11.S2 | 121.45,225.03 134.15,225.03 | 146.85,225.03 147.36,224.52 A10.S2 | 134.15,225.03 146.85,225.03 | 146.85,225.03 159.55,225.03 160.06,224.52 A09.S2
D01WRITEH  (via drill 0.61)
  Top 0.254: B16.K2 67.6,172.71 67.6,172.2 65.57,170.17 B16.L2 65.57,169.15 66.58,168.14 v66.58,160.52 | v62.01,93.46 62.01,124.96 62.52,125.46 63.54,125.46 | 63.54,125.46 64.55,125.46 C16.D2 | v76.24,146.8 v76.24,153.4 | v65.57,141.72 64.04,140.2 64.04,133.08 63.54,132.58 63.54,125.46
  Bottom 0.254: v62.01,93.46 59.47,90.92 C17.S1 | v66.58,160.52 66.58,158.99 78.27,158.99 79.28,157.98 79.28,153.4 v76.24,153.4 | v76.24,146.8 75.73,146.29 69.63,146.29 68.11,144.77 68.11,141.72 v65.57,141.72
D02MEM0  (via drill 0.61)
  Top 0.254: v3.59,192.01 2.58,191 v2.58,189.47
  Bottom 0.254: v3.59,192.01 11.72,192.01 13.24,190.49 15.78,190.49 16.8,189.47 B20.D1 | v2.58,189.47 2.07,189.98 1.56,189.98 1.56,244.34 7.15,244.34 16.8,253.99 50.84,253.99 A17N.E2
D02MEM1  (via drill 0.61)
  Top 0.254: v41.69,190.49 43.72,192.52 43.72,194.04 44.23,194.55 44.23,211.32 46.77,213.86 46.77,215.89 47.79,216.9 47.79,236.21 50.84,239.26 50.84,247.89 51.85,248.91 A17N.H2
  Bottom 0.254: v41.69,190.49 35.6,190.49 32.55,187.44 22.39,187.44 20.86,185.92 B20.E1
D02MEM2  (via drill 0.61)
  Top 0.254: v6.64,174.23 7.15,174.74 7.15,216.9 6.64,217.41 6.64,220.46 5.62,221.48 5.62,226.05 6.64,227.06 v6.64,234.18
  Bottom 0.254: v6.64,174.23 18.83,174.23 19.85,173.22 B20.K1 | v6.64,234.18 10.7,238.24 45.76,238.24 49.82,242.3 51.85,242.3 A17N.K2
D02MEM3  (via drill 0.61)
  Top 0.254: v7.66,171.18 8.16,171.69 8.16,217.92 7.66,218.43 v7.66,233.16
  Bottom 0.254: v7.66,171.18 11.72,171.18 12.23,170.68 16.29,170.68 16.8,170.17 B20.L1 | v7.66,233.16 12.23,237.73 50.84,237.73 51.85,236.72 A17N.M2
D02MEM4  (via drill 0.61)
  Top 0.254: v5.62,160.01 6.13,160.52 6.13,173.22 5.62,173.72 5.62,174.74 6.64,175.76 6.64,216.4 6.13,216.9 6.13,219.95 5.12,220.97 v5.12,227.06
  Bottom 0.254: v5.62,160.01 9.69,155.94 16.29,155.94 16.8,156.45 B20.R1 | v5.12,227.06 9.69,231.64 50.84,231.64 51.85,230.62 A17N.P2
D02MEM5  (via drill 0.61)
  Top 0.254: v7.66,155.44 6.64,156.45 6.64,172.71 7.66,173.72 7.66,217.41 7.15,217.92 7.15,221.48 v6.64,221.98
  Bottom 0.254: v7.66,155.44 14.77,155.44 15.78,154.42 19.85,154.42 B20.S1 | v6.64,221.98 50.33,221.98 51.85,223.51 A17N.S2
D02MEM6  (via drill 0.61)
  Top 0.254: v46.77,180.84 46.77,184.39 47.28,184.9 47.28,215.38 48.8,216.9 48.8,219.95 A17N.T2
  Bottom 0.254: v46.77,180.84 16.29,180.84 14.77,179.31 B20.H2
D02MEM7  (via drill 0.61)
  Top 0.254: v10.2,208.78 10.2,204.2 12.23,202.17 12.23,177.79 11.21,176.77 B20.J2
  Bottom 0.254: v10.2,208.78 13.75,212.33 43.72,212.33 45.25,213.86 48.8,213.86 A17N.V2
D02MEM8  (via drill 0.61)
  Top 0.254: v4.61,163.56 5.12,164.07 5.12,172.2 4.61,172.71 4.61,175.76 5.62,176.77 5.62,215.38 5.12,215.89 5.12,218.94 3.08,220.97 v3.08,247.89
  Bottom 0.254: v4.61,163.56 10.2,163.56 B20.N2 | v3.08,247.89 15.28,260.08 63.54,260.08 64.55,259.07 A16.D2
D02MEM9  (via drill 0.61)
  Top 0.254: v40.68,161.53 40.68,172.71 41.69,173.72 41.69,174.74 41.18,175.25 41.18,185.41 44.23,188.46 44.23,193.54 46.26,195.57 v46.26,196.58 | v48.3,198.62 48.3,211.32 50.84,213.86 50.84,238.24 54.39,241.8 v54.39,253.48
  Bottom 0.254: v40.68,161.53 15.78,161.53 14.77,160.52 B20.P2 | v48.3,198.62 v46.26,196.58 | v54.39,253.48 54.9,253.99 66.08,253.99 67.6,255.51 A16.E2
D02MEM10  (via drill 0.61)
  Top 0.254: v21.88,162.55 v21.88,150.36 | v33.56,164.07 34.58,165.09 34.58,168.14 33.56,169.15 v33.56,169.66 | v41.69,171.69 44.23,174.23 44.23,186.42 v46.26,188.46 | v52.87,190.49 53.88,191.5 53.88,196.58 61,203.7 61,214.87 v63.03,216.9 | v62.52,224.02 63.54,225.03 63.54,252.97 64.55,253.99 68.11,253.99 68.11,249.92 A16.H2
  Bottom 0.254: v21.88,150.36 22.9,149.34 22.9,148.32 22.39,147.82 21.88,147.82 21.88,146.8 21.37,146.29 15.78,146.29 14.77,147.31 B20.U2 | v21.88,162.55 22.39,162.04 31.53,162.04 v33.56,164.07 | v33.56,169.66 35.6,171.69 v41.69,171.69 | v46.26,188.46 48.3,190.49 v52.87,190.49 | v63.03,216.9 63.03,224.02 v62.52,224.02
D02MEM11  (via drill 0.61)
  Top 0.254: v13.24,144.26 14.77,142.74 v14.77,142.23 | v42.71,141.72 43.22,141.21 v43.22,139.18 | v61,139.18 61.5,139.69 61.5,194.04 62.01,194.55 62.01,207.76 v62.52,208.27 | v59.47,211.32 57.44,213.35 57.44,237.73 v59.47,239.76
  Bottom 0.254: v13.24,144.26 11.21,144.26 B20.V2 | v14.77,142.23 16.29,140.7 41.69,140.7 v42.71,141.72 | v61,139.18 v43.22,139.18 | v62.52,208.27 v59.47,211.32 | v59.47,239.76 62.52,242.81 67.6,242.81 A16.K2
D03BEMA0L  (via drill 0.61)
  Top 0.254: v62.01,11.67 59.47,14.21 D17.U1 | v116.37,7.61 116.37,105.65 115.86,106.16 115.86,255 110.78,260.08 103.67,260.08 103.67,259.07 A13.D2
  Bottom 0.254: v62.01,11.67 64.04,9.64 75.22,9.64 75.73,10.15 76.74,10.15 77.76,9.13 88.43,9.13 89.95,7.61 v116.37,7.61 | 101.64,257.54 91.48,257.54 90.97,258.05 A14.D2 | 101.64,257.54 102.65,258.56 A13.D2 | 117.38,257.54 118.4,258.56 A12.D2 | 101.64,257.54 117.38,257.54 | 130.08,257.54 131.1,258.56 A11.D2 | 117.38,257.54 130.08,257.54 | 142.78,257.54 143.8,258.56 A10.D2 | 130.08,257.54 142.78,257.54 | 142.78,257.54 155.48,257.54 156.5,258.56 A09.D2
D03BEMA1L  (via drill 0.61)
  Top 0.254: v57.95,23.86 57.44,23.36 57.44,17.77 63.03,12.18 63.03,9.64 69.63,3.04 v157.52,3.04
  Bottom 0.254: 104.68,257.04 95.03,257.04 94.02,256.02 A14.E2 | 104.68,257.04 105.7,256.02 A13.E2 | 120.94,257.04 121.96,256.02 A12.E2 | 120.94,257.04 104.68,257.04 | 133.64,257.04 134.66,256.02 A11.E2 | 133.64,257.04 120.94,257.04 | 133.64,257.04 146.34,257.04 147.36,256.02 A10.E2 148.37,256.02 149.39,257.04 162.09,257.04 | v57.95,23.86 56.42,25.39 50.84,25.39 D17.R2 | v157.52,3.04 176.31,21.83 176.31,137.66 168.18,137.66 167.68,138.16 167.68,139.69 168.18,139.69 172.76,144.26 172.76,233.67 173.26,234.18 173.26,254.5 169.71,254.5 167.17,257.04 162.09,257.04 | 162.09,257.04 161.07,256.02 A09.E2
D03BEMA2L  (via drill 0.61)
  Top 0.254: v32.55,11.67 31.53,12.69 31.53,57.39 28.99,59.93 28.99,62.98 29.5,63.49 31.53,63.49 31.53,62.98 32.04,62.47 34.58,62.47 34.58,113.27 35.6,114.29 35.6,117.84 35.09,118.35 v35.09,124.45 | v21.37,125.97 21.88,126.48 21.88,136.13 21.37,136.64 21.37,146.29 21.88,146.8 v21.88,148.83 | v2.07,148.83 1.56,149.34 1.56,206.74 v3.59,208.78 | v62.01,221.98 66.58,226.56 v66.58,238.75 | v91.48,244.34 93,245.86 93,248.91 A14.H2
  Bottom 0.254: 146.85,250.43 136.69,250.43 135.67,249.42 A11.H2 134.66,249.92 134.15,250.43 123.99,250.43 122.97,249.42 A12.H2 121.96,249.92 121.45,250.43 104.68,250.43 | 146.85,250.43 147.36,249.92 A10.H2 | 146.85,250.43 159.55,250.43 160.06,249.92 A09.H2 | v32.55,11.67 34.58,9.64 53.88,9.64 54.9,10.66 D17.V1 | v35.09,124.45 34.58,123.94 23.4,123.94 v21.37,125.97 | v2.07,148.83 v21.88,148.83 | v3.59,208.78 10.7,215.89 36.1,215.89 39.66,219.44 57.44,219.44 59.98,221.98 v62.01,221.98 | v66.58,238.75 69.12,241.29 88.43,241.29 v91.48,244.34 | 104.68,250.43 105.7,249.42 A13.H2 | 104.68,250.43 97.06,250.43 96.56,249.92 94.02,249.92 A14.H2
D03BMA0  (via drill 0.61)
  Top 0.254: v72.68,232.14 72.68,211.82 76.24,208.27 76.24,190.49 B15.D2
  Bottom 0.254: v72.68,232.14 5.62,232.14 5.62,236.21 10.7,241.29 12.74,241.29 A20N.K2
D03BMA1  (via drill 0.61)
  Top 0.254: v72.68,234.68 73.7,233.67 73.7,231.13 73.19,230.62 73.19,212.33 79.28,206.24 79.28,174.23 v78.78,173.72
  Bottom 0.254: v72.68,234.68 16.29,234.68 14.77,236.21 A20N.M2 | v78.78,173.72 79.28,173.22 80.3,173.22 B15.K2
D03BMA2  (via drill 0.61)
  Top 0.254: v12.74,218.43 12.74,228.59 A20N.P2 | v4.1,210.81 4.61,210.3 4.61,177.79 2.58,175.76 v2.58,157.47
  Bottom 0.254: v12.74,218.43 10.7,216.4 9.69,216.4 v4.1,210.81 | v2.58,157.47 7.66,152.39 47.28,152.39 48.3,153.4 50.33,153.4 51.34,152.39 69.12,152.39 73.7,156.96 77.25,156.96 B15.R2
D03BMA3  (via drill 0.61)
  Top 0.254: v98.59,223 105.7,215.89 113.32,215.89 v113.32,211.32 | v126.02,212.33 136.18,202.17 v136.18,149.85 | v119.92,149.34 120.43,148.83 v120.43,141.72 | v87.92,141.72 87.41,141.21 87.41,135.62 C15.A1
  Bottom 0.254: v98.59,223 95.03,223 94.52,222.49 72.17,222.49 69.12,225.54 29.5,225.54 28.99,226.05 25.44,226.05 24.93,225.54 15.78,225.54 14.77,224.52 A20N.S2 | v113.32,211.32 113.83,211.82 122.46,211.82 122.97,212.33 v126.02,212.33 | v136.18,149.85 135.67,149.34 v119.92,149.34 | v120.43,141.72 v87.92,141.72
D03BMA4  (via drill 0.61)
  Top 0.254: v19.34,211.32 19.34,212.33 16.29,212.33 11.72,216.9 11.72,219.44 11.21,219.95 A20N.T2 | v25.44,205.22 25.44,177.79 v27.98,175.25 | v38.64,175.25 38.14,174.74 38.14,153.4 37.63,152.9 37.63,147.82 v37.12,147.31 | v52.36,141.72 v52.36,144.26 | v57.95,141.72 57.44,141.21 57.44,121.4 v58.96,119.88
  Bottom 0.254: v25.44,205.22 v19.34,211.32 | v27.98,175.25 28.48,174.74 38.14,174.74 v38.64,175.25 | v37.12,147.31 38.14,146.29 47.28,146.29 48.3,147.31 49.31,147.31 v52.36,144.26 | v57.95,141.72 v52.36,141.72 | v58.96,119.88 61,117.84 79.28,117.84 79.79,118.35 83.86,118.35 C15.F1
D03BMA5  (via drill 0.61)
  Top 0.254: v112.3,111.75 v101.64,101.08 | v117.38,119.88 v117.38,111.75 | v171.74,120.38 171.23,120.89 171.23,142.23 170.72,142.74 170.72,193.54 170.22,194.04 170.22,195.06 171.23,196.08 171.23,237.73 170.22,238.75 v170.22,271.77 | v27.98,266.69 18.83,257.54 18.83,218.43 v15.28,214.87
  Bottom 0.254: v101.64,101.08 98.59,101.08 98.08,101.59 88.94,101.59 C15.M1 | v117.38,111.75 v112.3,111.75 | v117.38,119.88 117.89,120.38 v171.74,120.38 | v170.22,271.77 57.95,271.77 52.87,266.69 v27.98,266.69 | v15.28,214.87 11.72,214.87 A20N.V2
D03BMA6  (via drill 0.61)
  Top 0.254: v75.73,257.04 76.24,256.53 76.24,237.22 79.79,233.67 v79.79,220.97 | v81.82,219.95 82.33,219.44 82.33,201.16 v86.9,196.58 | v117.38,197.6 116.88,197.09 116.88,140.7 v117.38,140.2 | v104.18,140.2 104.68,139.69 104.68,131.05 v96.05,122.42
  Bottom 0.254: v75.73,257.04 25.94,257.04 24.42,258.56 A19N.D2 | v79.79,220.97 80.81,219.95 v81.82,219.95 | v86.9,196.58 98.59,196.58 99.6,195.57 101.13,195.57 102.14,196.58 111.29,196.58 112.3,195.57 115.35,195.57 v117.38,197.6 | v117.38,140.2 v104.18,140.2 | v96.05,122.42 94.52,120.89 84.87,120.89 80.81,124.96 78.27,124.96 C15.D2
D03BMA7  (via drill 0.61)
  Top 0.254: v28.99,267.7 28.99,257.54 A19N.E2 | v163.1,276.34 169.71,269.74 169.71,234.68 170.22,234.18 170.22,221.48 168.69,219.95 v168.69,141.72 | v164.12,137.15 162.09,135.12 162.09,128 v162.6,127.5 | v154.98,126.99 v129.07,101.08 | v97.06,103.62 95.54,105.14 95.54,108.19 v96.05,108.7
  Bottom 0.254: v28.99,267.7 37.63,276.34 v163.1,276.34 | v168.69,141.72 v164.12,137.15 | v162.6,127.5 162.09,126.99 v154.98,126.99 | v129.07,101.08 128.56,101.59 123.99,101.59 123.48,101.08 120.43,101.08 119.92,101.59 108.24,101.59 107.73,101.08 104.18,101.08 103.16,102.1 101.13,102.1 100.62,101.59 99.1,101.59 v97.06,103.62 | v96.05,108.7 95.54,108.19 82.33,108.19 C15.K2
D03BMA8  (via drill 0.61)
  Top 0.254: v83.35,247.89 82.84,248.4 82.84,261.61 85.89,264.66 85.89,268.72 88.94,271.77 155.99,271.77 155.99,224.02 166.66,213.35 v166.66,209.79 | v171.23,194.55 171.23,143.24 172.25,142.23 v172.25,136.64 | v145.83,129.02 127.04,110.22 v127.04,78.73 | v81.32,78.73 79.28,80.76 79.28,90.92 78.27,91.94 78.27,92.95 C15.R2
  Bottom 0.254: v83.35,247.89 77.25,247.89 73.7,244.34 69.12,244.34 66.08,247.38 28.99,247.38 27.47,248.91 A19N.H2 | v166.66,209.79 171.23,205.22 v171.23,194.55 | v172.25,136.64 165.64,130.04 146.85,130.04 v145.83,129.02 | v127.04,78.73 v81.32,78.73
D03BMA9  (via drill 0.61)
  Top 0.254: v31.53,211.32 31.53,242.3 27.47,242.3 A19N.K2 | v28.48,208.78 28.48,186.42 v30.52,184.39 | v54.39,180.84 56.93,178.3 56.93,174.74 55.92,173.72 v55.92,171.69 | v73.7,157.98 73.19,157.47 73.19,139.69 74.2,138.67 74.2,135.62 C16.A1
  Bottom 0.254: v31.53,211.32 28.99,208.78 v28.48,208.78 | v30.52,184.39 33.56,181.34 45.76,181.34 46.26,181.85 47.28,181.85 48.3,180.84 v54.39,180.84 | v55.92,171.69 59.47,168.14 69.12,168.14 72.68,164.58 72.68,162.04 66.58,162.04 65.57,161.02 65.57,158.48 73.19,158.48 v73.7,157.98
D03BMA10  (via drill 0.61)
  Top 0.254: v28.99,230.62 28.99,234.68 27.47,236.21 A19N.M2 | v135.16,232.14 139.74,227.57 v139.74,141.21 | v78.27,139.69 76.24,137.66 v76.24,119.37
  Bottom 0.254: v28.99,230.62 31.02,228.59 83.86,228.59 86.9,231.64 95.54,231.64 96.05,232.14 v135.16,232.14 | v139.74,141.21 137.7,139.18 78.78,139.18 v78.27,139.69 | v76.24,119.37 72.17,119.37 C16.F1
D03BMA11  (via drill 0.61)
  Top 0.254: v25.44,249.92 25.44,231.64 26.45,230.62 A19N.P2 | v122.97,250.94 123.99,249.92 123.99,217.92 130.08,211.82 v130.08,211.32 | v130.08,202.68 123.99,196.58 117.38,196.58 117.38,187.44 123.99,180.84 123.99,142.23 125,141.21 125,138.67 123.48,137.15 v117.38,137.15 | v108.75,136.64 107.73,135.62 107.73,114.29 v104.68,111.24
  Bottom 0.254: v25.44,249.92 25.94,250.43 96.05,250.43 96.56,250.94 v122.97,250.94 | v130.08,211.32 v130.08,202.68 | v117.38,137.15 116.88,136.64 v108.75,136.64 | v104.68,111.24 82.33,111.24 81.82,110.73 78.27,110.73 75.73,108.19 71.66,108.19 71.16,107.68 70.65,107.68 70.14,107.18 70.14,103.62 74.2,103.62 C16.M1
D03BTP2  (via drill 0.61)
  Top 0.254: v41.18,61.46 41.18,56.88 42.2,55.87 D18.D1 | v32.55,63.49 28.99,67.04 28.99,99.05 25.44,102.6 25.44,103.62 28.48,106.67 28.48,113.27 29.5,114.29 v29.5,117.34 | v39.15,125.97 41.18,128 v41.18,131.05 | v58.46,183.38 61,185.92 61,194.55 61.5,195.06 61.5,210.81 64.55,213.86 A16.V2 | v39.66,183.88 37.63,181.85 37.63,154.42 35.09,151.88 35.09,151.37 34.58,150.86 34.58,149.34 36.1,147.82 36.1,146.8 37.63,145.28 37.63,135.62 v37.12,135.12
  Bottom 0.254: v41.18,61.46 39.15,63.49 v32.55,63.49 | v29.5,117.34 28.99,117.84 28.99,123.43 36.61,123.43 v39.15,125.97 | C17.B1 54.9,131.56 53.88,130.54 41.69,130.54 v41.18,131.05 v37.12,135.12 | v58.46,183.38 57.95,183.88 v39.66,183.88
D03EA0  (via drill 0.61)
  Top 0.254: v83.35,202.68 86.9,199.12 B15.A1 | v34.58,211.32 34.58,256.53 36.1,258.05 A18N.D2
  Bottom 0.254: v83.35,202.68 73.7,212.33 44.74,212.33 43.72,211.32 v34.58,211.32
D03EA1  (via drill 0.61)
  Top 0.254: v82.84,196.58 82.84,183.88 B15.F1 | v43.22,197.09 43.72,197.6 43.72,211.82 44.74,212.84 44.74,248.4 40.17,252.97 40.17,255 A18N.E2
  Bottom 0.254: v82.84,196.58 82.84,193.54 46.77,193.54 v43.22,197.09
D03EA2  (via drill 0.61)
  Top 0.254: v71.66,184.39 69.63,186.42 69.63,199.63 68.62,200.65 64.04,200.65 64.04,211.32 67.09,214.36 67.09,225.03 69.63,227.57 v69.63,245.35
  Bottom 0.254: v71.66,184.39 74.71,184.39 74.71,181.34 74.2,180.84 73.19,180.84 73.19,172.2 80.3,165.09 81.82,165.09 82.33,165.6 86.4,165.6 86.9,166.1 B15.M1 | v69.63,245.35 67.09,247.89 41.18,247.89 40.17,248.91 A18N.H2
D03EMA0H  (via drill 0.61)
  Top 0.254: v57.95,42.66 57.44,42.15 57.44,28.44 58.46,27.42 D17.P1 | v39.15,187.95 38.14,186.93 v38.14,183.88 | v39.66,182.36 38.14,180.84 38.14,178.3 v39.66,176.77 | v44.23,172.2 44.23,169.15 v42.2,167.12 | v44.23,165.09 44.23,161.02 41.18,157.98 v41.18,143.24 | v30.52,142.74 28.99,141.21 28.99,128 25.44,124.45 25.44,112.26 23.91,110.73 v23.91,110.22 | v35.6,109.72 35.09,109.21 35.09,57.39 v35.6,56.88 | v35.6,53.33 36.1,52.82 36.1,49.77 D18.F2
  Bottom 0.254: D18.F2 36.1,48.76 35.6,48.76 33.56,46.72 D19.H1 34.07,45.71 37.12,45.71 38.64,44.18 56.42,44.18 v57.95,42.66 | v39.15,187.95 39.66,187.44 46.26,187.44 47.79,185.92 48.8,185.92 49.82,186.93 53.38,186.93 54.9,188.46 B17.D1 | v39.66,182.36 v38.14,183.88 | v44.23,172.2 v39.66,176.77 | v44.23,165.09 v42.2,167.12 | v41.18,143.24 40.68,142.74 v30.52,142.74 | v23.91,110.22 25.94,108.19 29.5,108.19 32.04,110.73 34.58,110.73 v35.6,109.72 | v35.6,56.88 35.09,56.38 35.09,53.33 v35.6,53.33
D03EMA0L  (via drill 0.61)
  Top 0.254: v59.98,186.93 59.98,197.09 58.96,198.11 B17.A1 | v44.23,92.44 44.23,79.74 43.72,79.24 43.72,63.49 44.23,62.98 44.23,60.95 45.76,59.42 D18.C1 | v47.28,92.44 47.79,92.95 47.79,94.48 v48.8,95.49 | v78.78,104.64 79.28,105.14 79.28,117.34 79.79,117.84 79.79,136.13 v80.3,136.64 | v96.05,137.66 95.54,138.16 95.54,185.41 98.08,187.95 98.08,189.98 97.57,190.49 93.51,190.49 v93.51,188.96
  Bottom 0.254: D19.J1 30.52,43.17 30.52,47.74 33.06,47.74 37.12,51.8 39.15,51.8 D18.E2 40.17,52.82 40.17,55.36 42.71,57.9 45.25,57.9 D18.C1 | v59.98,186.93 86.4,186.93 86.9,186.42 B15.E1 87.92,185.92 90.46,185.92 v93.51,188.96 | v47.28,92.44 v44.23,92.44 | v48.8,95.49 61.5,95.49 63.03,97.02 65.57,97.02 67.09,95.49 81.82,95.49 82.33,96 82.33,104.64 v78.78,104.64 | v80.3,136.64 83.86,136.64 84.87,137.66 v96.05,137.66
D03EMA1H  (via drill 0.61)
  Top 0.254: v34.58,41.14 34.58,50.79 33.56,51.8 D19.E1 | v56.93,194.55 56.93,191.5 58.46,189.98 B17.E1 | v63.03,195.57 v65.06,197.6 | v71.66,198.62 v75.22,202.17 | v100.62,201.66 105.7,196.58 110.78,196.58 110.78,166.61 113.32,164.07 v113.32,162.55 | v119.92,162.04 120.94,161.02 120.94,142.74 122.97,140.7 v122.97,138.16 | v159.55,138.16 159.04,137.66 159.04,125.97 v160.56,124.45 | v172.25,123.43 172.76,122.92 172.76,119.88 171.74,118.86 171.74,34.53 v166.15,28.94
  Bottom 0.254: 52.36,34.53 52.36,37.58 50.33,37.58 48.3,39.61 46.77,39.61 D18.K1 45.76,40.12 44.74,41.14 v34.58,41.14 | 52.36,34.53 52.36,34.02 D17.M2 | v56.93,194.55 57.95,195.57 v63.03,195.57 | v65.06,197.6 65.57,197.09 70.14,197.09 v71.66,198.62 | v75.22,202.17 75.73,201.66 v100.62,201.66 | v113.32,162.55 113.83,162.04 v119.92,162.04 | v122.97,138.16 v159.55,138.16 | v160.56,124.45 161.58,123.43 v172.25,123.43 | v166.15,28.94 87.92,28.94 84.87,31.99 72.17,31.99 69.63,34.53 52.36,34.53
D03EMA1L  (via drill 0.61)
  Top 0.254: v80.3,196.58 82.33,194.55 82.33,171.69 82.84,171.18 | 82.84,171.18 B15.L1 | v27.98,76.19 28.48,75.68 28.48,56.88 29.5,55.87 D19.D1 | v70.65,85.33 70.14,85.84 70.14,107.68 69.63,108.19 v69.63,120.89 | v72.68,137.66 v72.68,123.94 | v83.35,137.66 82.84,138.16 82.84,171.18